# Altium PCB EndCap1.PcbDoc
Units mm, origin at the board's own origin, x right, y up, seen from the top; angles counter-clockwise.
Board outline 103 x 53 mm, 2 copper layers (Top Layer, Bottom Layer); 4 components, 0 nets, 13 pads, 0 vias.
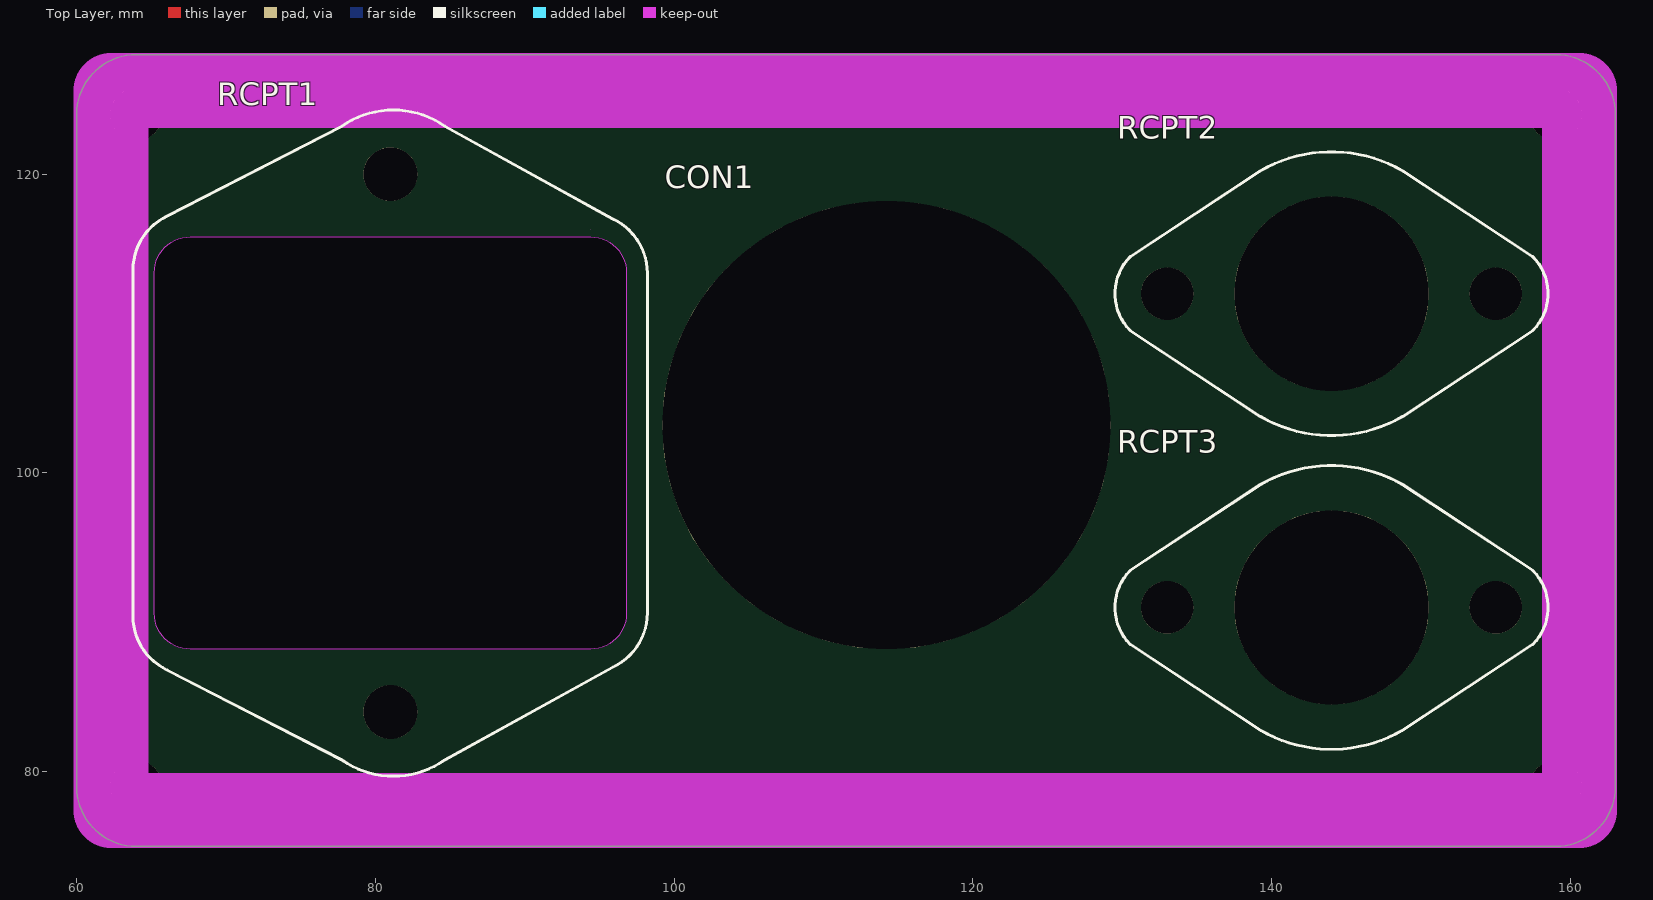
[diagram p0: Top Layer view]
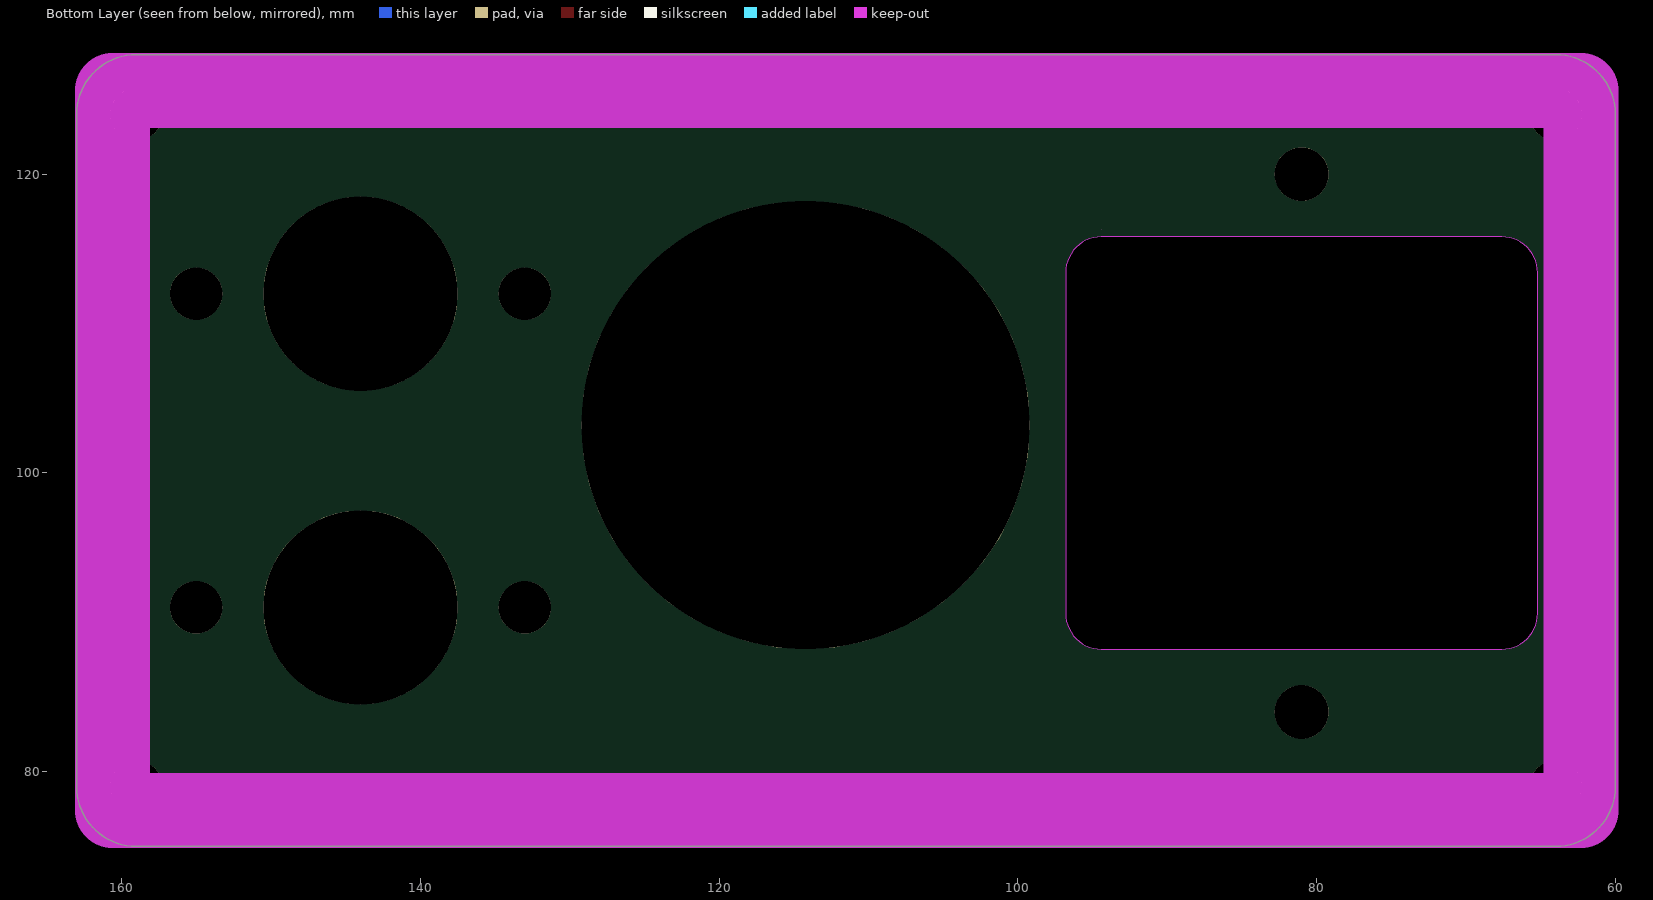
[diagram p1: Bottom Layer view, seen from below]

## Layer stack, top to bottom
Top Solder: solder mask 0.0102, Solder Resist, Dk 3.5
Top Layer: signal copper 0.0356
Dielectric 1: dielectric 0.32, FR-4, Dk 4.8
Bottom Layer: signal copper 0.0356
Bottom Solder: solder mask 0.0102, Solder Resist, Dk 3.5

## Board outline
60,79 60,124 cw(c64,124) 64,128 159,128 cw(c159,124) 163,124 163,79 cw(c159,79) 159,75 64,75 cw(c64,79)

## Design rules (kind name [scope] priority, off if disabled: settings)
Clearance [All] p1: gap=0.254 ignorepadtopadclearanceinfootprint=FALSE except(0: Arc-Hole Track-Hole SMDPad-Hole THPad-Hole Via-Hole Fill-Hole Poly-Hole Region-Hole Text-Hole)
PolygonConnect [All] p1: connectstyle=Relief reliefconductorwidth=0.254 reliefentries=4 polygonreliefangle="90 Angle" airgapwidth=0.254
RoutingVias [All] p1: holewidth=0.711 width=1.27 viastyle="Through Hole" minholewidth=0.711 minwidth=1.27 maxholewidth=0.711 maxwidth=1.27
SolderMaskExpansion [All] p1: expansion=0.102 istentingtop=FALSE
Width [All] p1: maxlimit=0.254 minlimit=0.254 preferedwidth=0.254
30 further rules are at their usual default settings.

## Components (designator, comment, footprint, x,y, rotation, side; value= is the part's Value field where it differs from the comment)
CON1 "USB_In" Ada4259 114.2,103.2 r0 top
RCPT1 "DC11.0001.003" DC11.0001.003 65.2,116.3 r270 top
RCPT2 "RPC2-12P-3S(71)" RPC2-12RB-3P(71) 144,112 r180 top
RCPT3 "RPC2-12P-3S(71)" RPC2-12RB-3P(71) 144,91 r180 top

## Footprints (in the part's own frame and the unit in brackets; to place one, negate y for a bottom-side part, rotate by r counter-clockwise, add the part's x,y. Pads: shape width x height; smd on the part's side, far side on the other; paste and mask are expansions set on the pad)
Ada4259 [mm]
  round 30 hole 30 unplated: 8(0,0)
DC11.0001.003 [mm]
  round 3.6 hole 3.6 unplated: 7(-3.7,15.8) 7(32.3,15.8)
  Keep-Out Layer board cut-out: 0.5,29.2 0.822,30.4 1.7,31.278 2.9,31.6 2.9,31.6 25.7,31.6 26.618,31.417 27.397,30.897 27.917,30.118 28.1,29.2 28.1,29.2 28.1,2.4 27.917,1.482 27.397,0.703 26.618,0.183 25.7,0 25.7,0 2.9,0 1.7,0.322 0.822,1.2 0.5,2.4 0.5,2.4
  Keep-Out Layer board cut-out: 0,29.2
  silkscreen extent -8,-1.43 36.6,33, body extent -7.8,-1.2 36.2,32.8, height 4.2
RPC2-12RB-3P(71) [mm]
  round 13 hole 13 unplated: 4(0,0)
  round 3.5 hole 3.5 unplated: 5(-11,0) 5(11,0)
  silkscreen extent -14.5,-9.5 14.5,9.5, body extent -14.5,-9.5 14.5,9.5, height 12

## Part data
CON1: "Panel mount mains output socket"
RCPT1: "Plug C14 Faston 4.8 x 0.8 mm 10 A/250 VAC black Screw mounting L + N + PE, DC11.0001.003, Schurter"
RCPT2 RCPT3: "CONN PLUG 3 POS W/SOCKETS"

## Free pads (board coordinates)
  round 3.5 hole 3.5 unplated: 0(64,79) 0(64,124) 0(159,79) 0(159,124)

## Nets (pads, with @x,y where several pads share a name; then routed paths per layer and width w, separated by ;. In a path a pad name is that pad's centre, name@x,y a point inside that pad or via, vN(x,y) a via of type N, cw(c..) or ccw(c..) an arc to the next point about the centre after c; other vN are vias at no path point)
pads on no net: CON1.8 RCPT1.7 RCPT2.4 RCPT2.5 RCPT3.4 RCPT3.5

## Keep-outs
Keep-Out Layer:
  lines w5: 62.3,125.6 62.3,77.4 160.6,77.4 160.6,125.6 62.4,125.6

## Silkscreen, mask and mechanical layers (free items; w line width, h text height)
Mechanical 1:
  the board outline again, w0.2
M2BoardOutline:
  the board outline again, w0.2
  text "CUTOUT REGION" at 68.954,103.054 h1.52
Mechanical 13:
  the board outline again, w0.2